# EAGLE board ML8511_Breakout_Panel_v10 (EAGLE 6.5.0), part 1 of 4
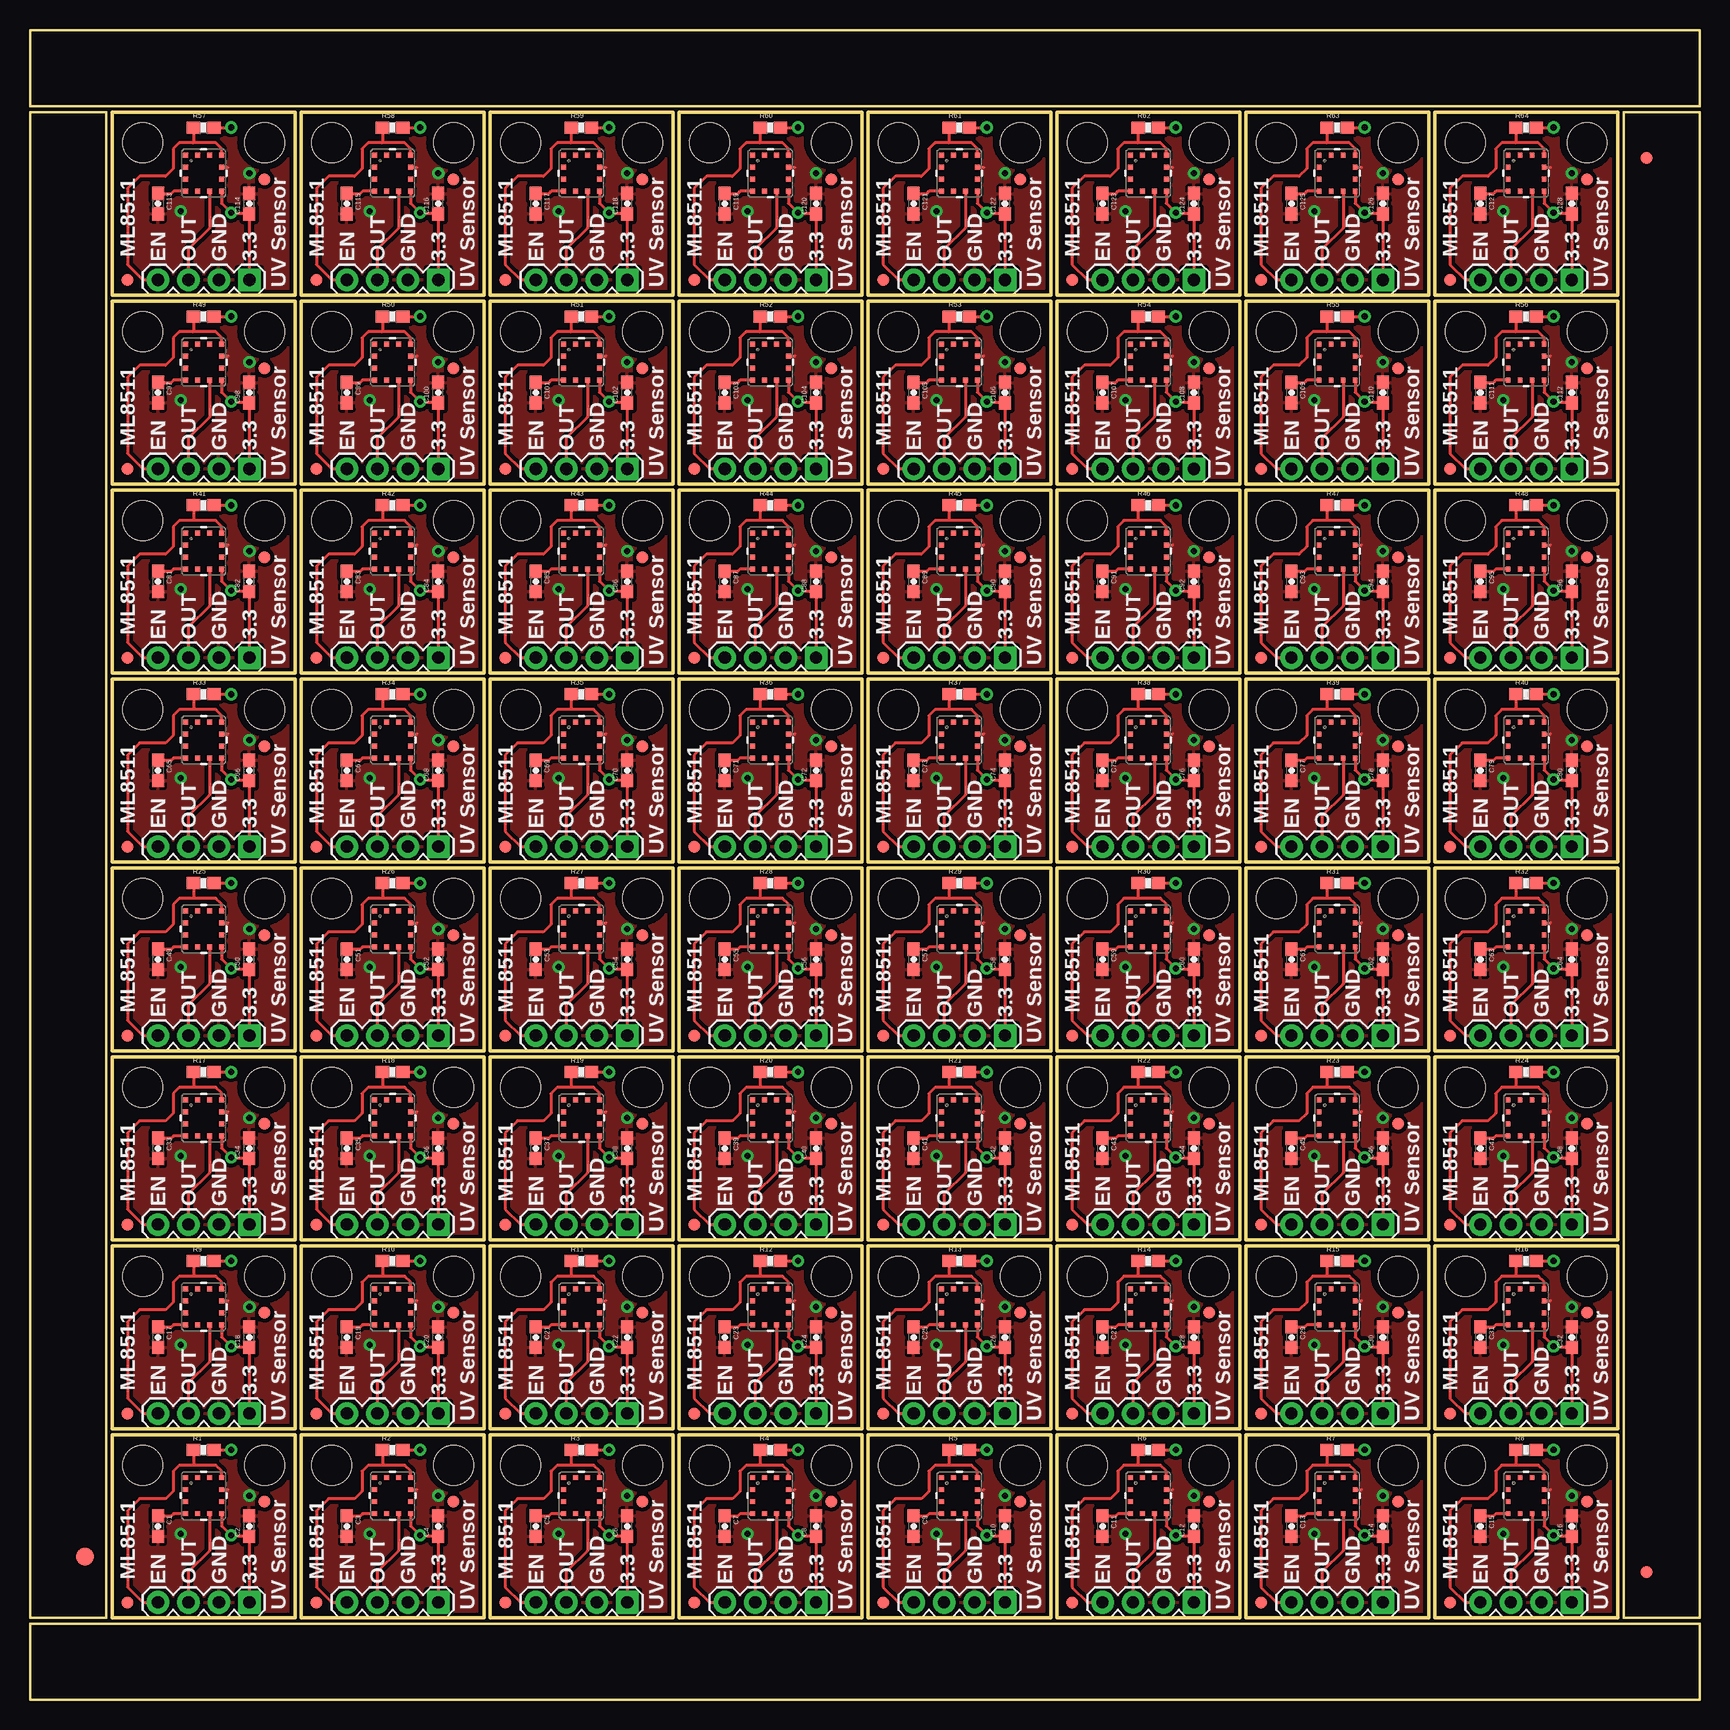
[diagram p0: board, top side]
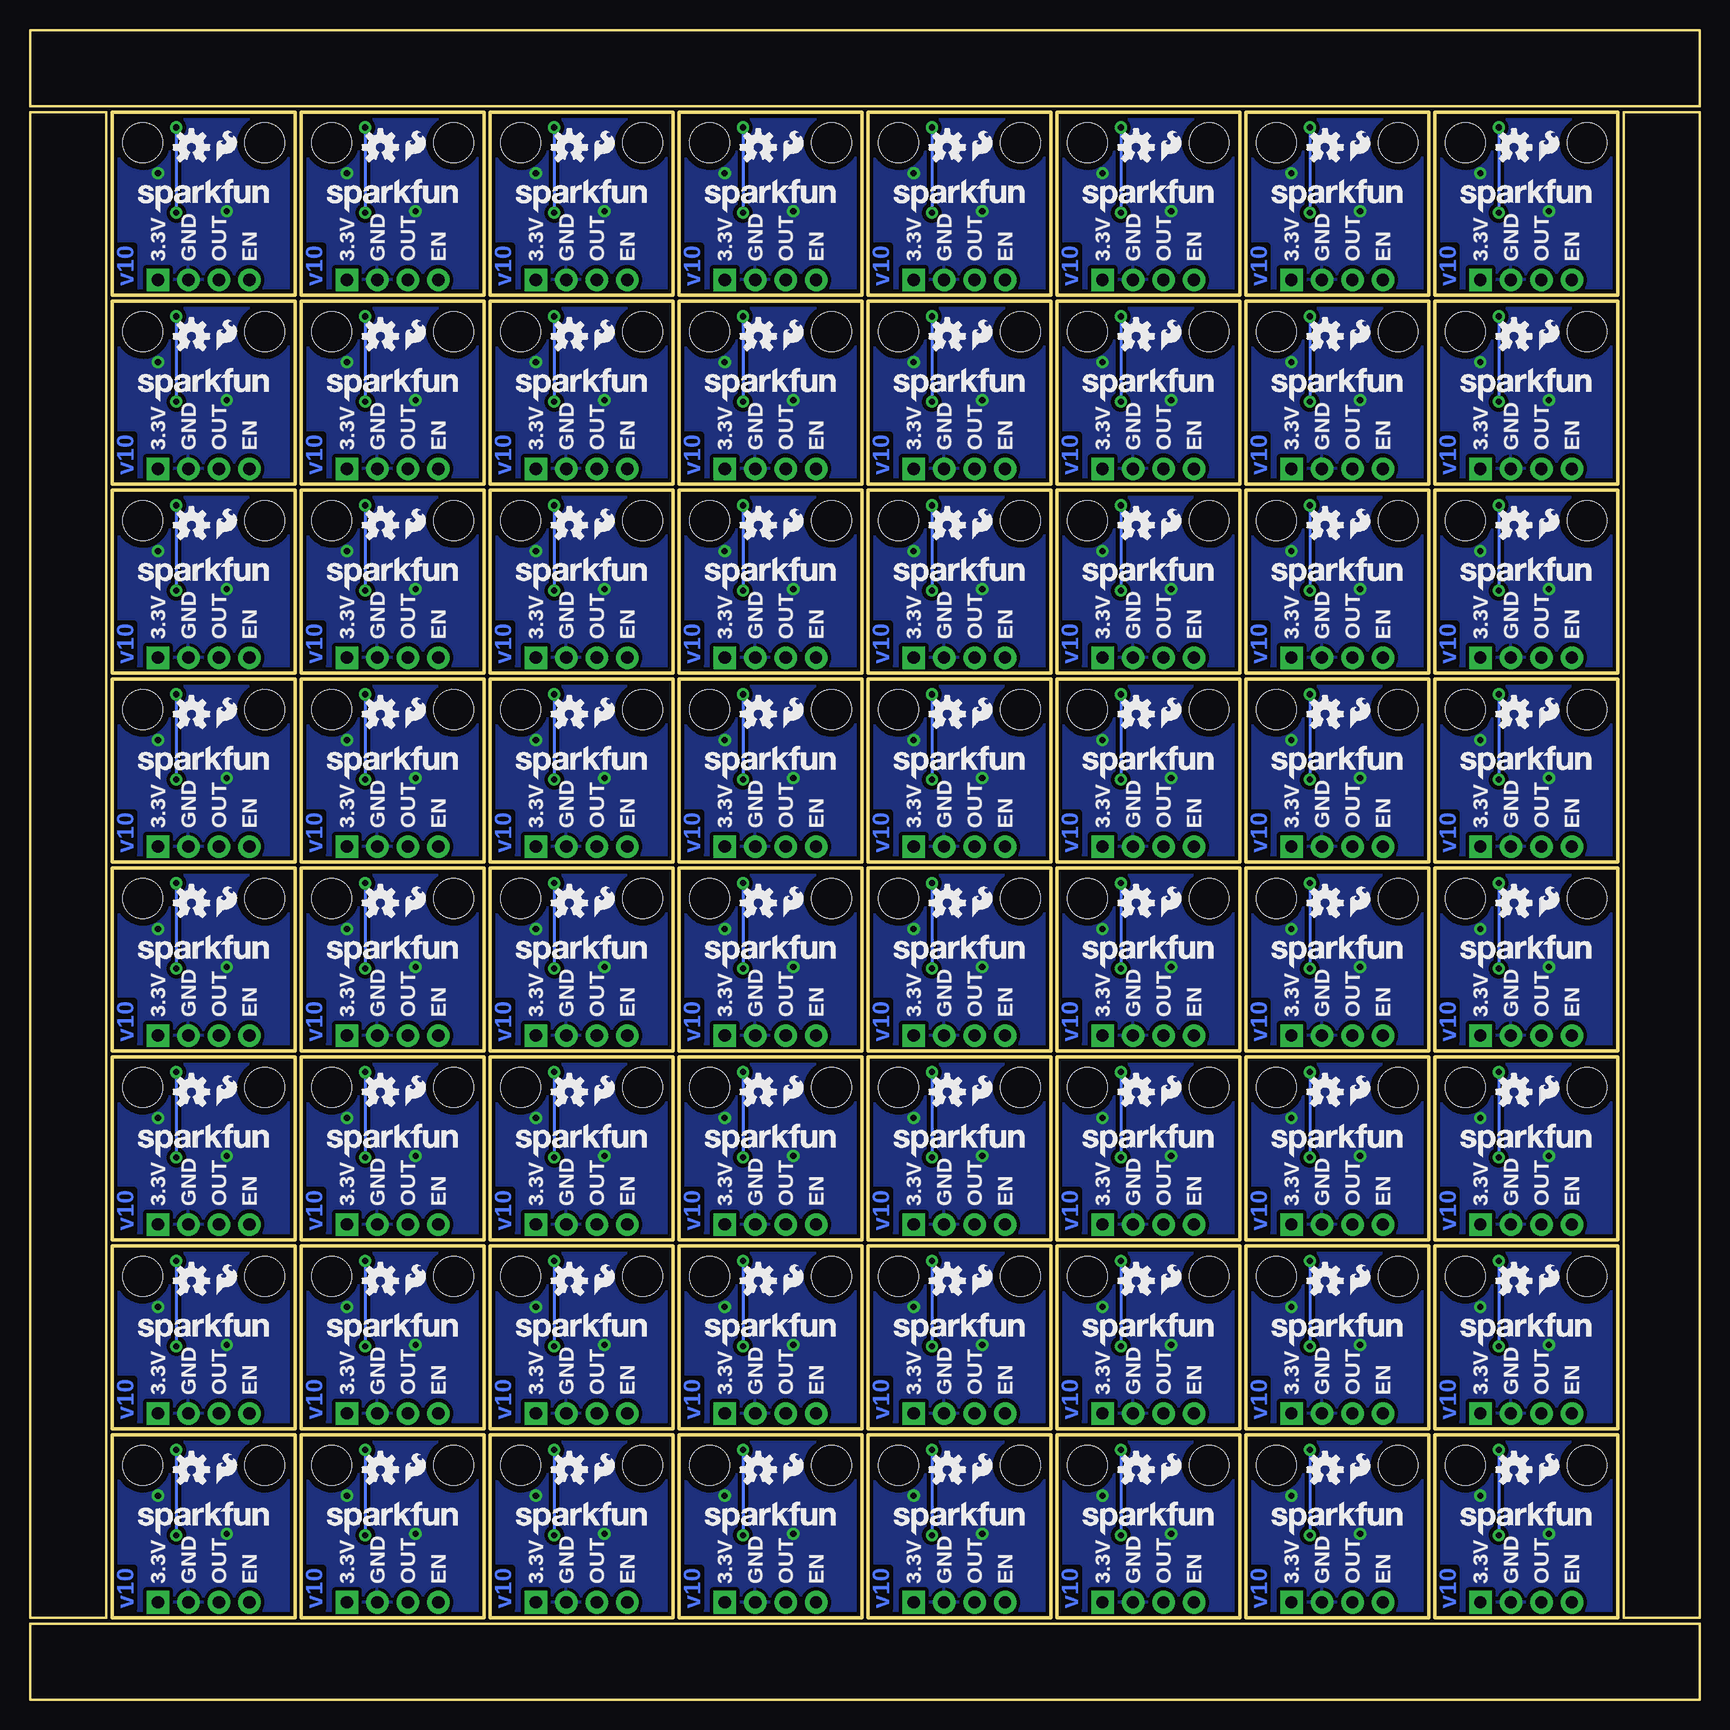
[diagram p1: board, bottom side, seen from below]

Size 139.19 x 139.19 mm. Coordinates in mm from the lower left corner, seen from the top.
Outline: 272 segments
Copper layers (1*16): Top 0.035mm / dielectric 1.5mm / Bottom 0.035mm
Design rules "SparkFun": minimum track width 8mil, minimum drill 20mil, track to track 8mil, track to pad 8mil, pad to pad 8mil, via to via 8mil, smd to smd 8mil, copper to edge 10mil, drill to drill 8mil, minimum pad ring 12mil, minimum via ring 10mil, stop-mask expansion 4mil, vias tented up to drill 25mil, thermal gap 10mil
tRestrict: area 13.5,16.1 to 15.5,18; area 15.9,17.9 to 16,18; area 15.9,17 to 16,17.1; area 29.2,16.1 to 31.2,18; area 31.6,17.9 to 31.8,18; area 31.6,17 to 31.8,17.1; area 45,16.1 to 47,18; area 47.4,17.9 to 47.5,18; area 47.4,17 to 47.5,17.1; area 60.7,16.1 to 62.7,18; area 63.1,17.9 to 63.2,18; area 63.1,17 to 63.2,17.1; 180 more areas

## Footprints (pad centres in the part's own frame; a part is rotated, then mirrored left to right if it is on the bottom)
0603-CAP = smd 1.1 x 1: 1 -0.85,0; 2 0.85,0
FIDUCIAL-1.5X3 = smd 1.5 x 1.5: 1 0,0
FIDUCIAL-1X2 = smd 1 x 1: 1 0,0
1X04 = drill 1.016 pad 1.88 square: 1 0,0 | drill 1.016 pad 1.88: 2 2.54,0; 3 5.08,0; 4 7.62,0
0603-RES = smd 1.1 x 1: 1 -0.85,0; 2 0.85,0
STAND-OFF = hole 3.302: 0,0
ML8511 = smd 0.4 x 0.4: 1 -1.5,-1.5; 2 -1.5,-0.5; 3 -1.5,0.5; 4 -1.5,1.5; 5 -0.5,1.5; 6 0.5,1.5; 7 1.5,1.5; 8 1.5,0.5; 9 1.5,-0.5; 10 1.5,-1.5; 11 0.5,-1.5; 12 -0.5,-1.5

## Placement (x,y rotation side)
C1  1nF  [0603-CAP]  10.67,14.48 270 top
C2  0.1uF  [0603-CAP]  18.29,14.48 90 top
C3  1nF  [0603-CAP]  26.42,14.48 270 top
C4  0.1uF  [0603-CAP]  34.04,14.48 90 top
C5  1nF  [0603-CAP]  42.16,14.48 270 top
C6  0.1uF  [0603-CAP]  49.78,14.48 90 top
C7  1nF  [0603-CAP]  57.91,14.48 270 top
C8  0.1uF  [0603-CAP]  65.53,14.48 90 top
C9  1nF  [0603-CAP]  73.66,14.48 270 top
C10  0.1uF  [0603-CAP]  81.28,14.48 90 top
C11  1nF  [0603-CAP]  89.41,14.48 270 top
C12  0.1uF  [0603-CAP]  97.03,14.48 90 top
C13  1nF  [0603-CAP]  105.16,14.48 270 top
C14  0.1uF  [0603-CAP]  112.78,14.48 90 top
C15  1nF  [0603-CAP]  120.9,14.48 270 top
C16  0.1uF  [0603-CAP]  128.52,14.48 90 top
C17  1nF  [0603-CAP]  10.67,30.23 270 top
C18  0.1uF  [0603-CAP]  18.29,30.23 90 top
C19  1nF  [0603-CAP]  26.42,30.23 270 top
C20  0.1uF  [0603-CAP]  34.04,30.23 90 top
C21  1nF  [0603-CAP]  42.16,30.23 270 top
C22  0.1uF  [0603-CAP]  49.78,30.23 90 top
C23  1nF  [0603-CAP]  57.91,30.23 270 top
C24  0.1uF  [0603-CAP]  65.53,30.23 90 top
C25  1nF  [0603-CAP]  73.66,30.23 270 top
C26  0.1uF  [0603-CAP]  81.28,30.23 90 top
C27  1nF  [0603-CAP]  89.41,30.23 270 top
C28  0.1uF  [0603-CAP]  97.03,30.23 90 top
C29  1nF  [0603-CAP]  105.16,30.23 270 top
C30  0.1uF  [0603-CAP]  112.78,30.23 90 top
C31  1nF  [0603-CAP]  120.9,30.23 270 top
C32  0.1uF  [0603-CAP]  128.52,30.23 90 top
C33  1nF  [0603-CAP]  10.67,45.97 270 top
C34  0.1uF  [0603-CAP]  18.29,45.97 90 top
C35  1nF  [0603-CAP]  26.42,45.97 270 top
C36  0.1uF  [0603-CAP]  34.04,45.97 90 top
C37  1nF  [0603-CAP]  42.16,45.97 270 top
C38  0.1uF  [0603-CAP]  49.78,45.97 90 top
C39  1nF  [0603-CAP]  57.91,45.97 270 top
C40  0.1uF  [0603-CAP]  65.53,45.97 90 top
C41  1nF  [0603-CAP]  73.66,45.97 270 top
C42  0.1uF  [0603-CAP]  81.28,45.97 90 top
C43  1nF  [0603-CAP]  89.41,45.97 270 top
C44  0.1uF  [0603-CAP]  97.03,45.97 90 top
C45  1nF  [0603-CAP]  105.16,45.97 270 top
C46  0.1uF  [0603-CAP]  112.78,45.97 90 top
C47  1nF  [0603-CAP]  120.9,45.97 270 top
C48  0.1uF  [0603-CAP]  128.52,45.97 90 top
C49  1nF  [0603-CAP]  10.67,61.72 270 top
C50  0.1uF  [0603-CAP]  18.29,61.72 90 top
C51  1nF  [0603-CAP]  26.42,61.72 270 top
C52  0.1uF  [0603-CAP]  34.04,61.72 90 top
C53  1nF  [0603-CAP]  42.16,61.72 270 top
C54  0.1uF  [0603-CAP]  49.78,61.72 90 top
C55  1nF  [0603-CAP]  57.91,61.72 270 top
C56  0.1uF  [0603-CAP]  65.53,61.72 90 top
C57  1nF  [0603-CAP]  73.66,61.72 270 top
C58  0.1uF  [0603-CAP]  81.28,61.72 90 top
C59  1nF  [0603-CAP]  89.41,61.72 270 top
C60  0.1uF  [0603-CAP]  97.03,61.72 90 top
C61  1nF  [0603-CAP]  105.16,61.72 270 top
C62  0.1uF  [0603-CAP]  112.78,61.72 90 top
C63  1nF  [0603-CAP]  120.9,61.72 270 top
C64  0.1uF  [0603-CAP]  128.52,61.72 90 top
C65  1nF  [0603-CAP]  10.67,77.47 270 top
C66  0.1uF  [0603-CAP]  18.29,77.47 90 top
C67  1nF  [0603-CAP]  26.42,77.47 270 top
C68  0.1uF  [0603-CAP]  34.04,77.47 90 top
C69  1nF  [0603-CAP]  42.16,77.47 270 top
C70  0.1uF  [0603-CAP]  49.78,77.47 90 top
C71  1nF  [0603-CAP]  57.91,77.47 270 top
C72  0.1uF  [0603-CAP]  65.53,77.47 90 top
C73  1nF  [0603-CAP]  73.66,77.47 270 top
C74  0.1uF  [0603-CAP]  81.28,77.47 90 top
C75  1nF  [0603-CAP]  89.41,77.47 270 top
C76  0.1uF  [0603-CAP]  97.03,77.47 90 top
C77  1nF  [0603-CAP]  105.16,77.47 270 top
C78  0.1uF  [0603-CAP]  112.78,77.47 90 top
C79  1nF  [0603-CAP]  120.9,77.47 270 top
C80  0.1uF  [0603-CAP]  128.52,77.47 90 top
C81  1nF  [0603-CAP]  10.67,93.22 270 top
C82  0.1uF  [0603-CAP]  18.29,93.22 90 top
C83  1nF  [0603-CAP]  26.42,93.22 270 top
C84  0.1uF  [0603-CAP]  34.04,93.22 90 top
C85  1nF  [0603-CAP]  42.16,93.22 270 top
C86  0.1uF  [0603-CAP]  49.78,93.22 90 top
C87  1nF  [0603-CAP]  57.91,93.22 270 top
C88  0.1uF  [0603-CAP]  65.53,93.22 90 top
C89  1nF  [0603-CAP]  73.66,93.22 270 top
C90  0.1uF  [0603-CAP]  81.28,93.22 90 top
C91  1nF  [0603-CAP]  89.41,93.22 270 top
C92  0.1uF  [0603-CAP]  97.03,93.22 90 top
C93  1nF  [0603-CAP]  105.16,93.22 270 top
C94  0.1uF  [0603-CAP]  112.78,93.22 90 top
C95  1nF  [0603-CAP]  120.9,93.22 270 top
C96  0.1uF  [0603-CAP]  128.52,93.22 90 top
C97  1nF  [0603-CAP]  10.67,108.97 270 top
C98  0.1uF  [0603-CAP]  18.29,108.97 90 top
C99  1nF  [0603-CAP]  26.42,108.97 270 top
C100  0.1uF  [0603-CAP]  34.04,108.97 90 top
C101  1nF  [0603-CAP]  42.16,108.97 270 top
C102  0.1uF  [0603-CAP]  49.78,108.97 90 top
C103  1nF  [0603-CAP]  57.91,108.97 270 top
C104  0.1uF  [0603-CAP]  65.53,108.97 90 top
C105  1nF  [0603-CAP]  73.66,108.97 270 top
C106  0.1uF  [0603-CAP]  81.28,108.97 90 top
C107  1nF  [0603-CAP]  89.41,108.97 270 top
C108  0.1uF  [0603-CAP]  97.03,108.97 90 top
C109  1nF  [0603-CAP]  105.16,108.97 270 top
C110  0.1uF  [0603-CAP]  112.78,108.97 90 top
C111  1nF  [0603-CAP]  120.9,108.97 270 top
C112  0.1uF  [0603-CAP]  128.52,108.97 90 top
C113  1nF  [0603-CAP]  10.67,124.71 270 top
C114  0.1uF  [0603-CAP]  18.29,124.71 90 top
C115  1nF  [0603-CAP]  26.42,124.71 270 top
C116  0.1uF  [0603-CAP]  34.04,124.71 90 top
C117  1nF  [0603-CAP]  42.16,124.71 270 top
C118  0.1uF  [0603-CAP]  49.78,124.71 90 top
C119  1nF  [0603-CAP]  57.91,124.71 270 top
C120  0.1uF  [0603-CAP]  65.53,124.71 90 top
C121  1nF  [0603-CAP]  73.66,124.71 270 top
C122  0.1uF  [0603-CAP]  81.28,124.71 90 top
C123  1nF  [0603-CAP]  89.41,124.71 270 top
C124  0.1uF  [0603-CAP]  97.03,124.71 90 top
C125  1nF  [0603-CAP]  105.16,124.71 270 top
C126  0.1uF  [0603-CAP]  112.78,124.71 90 top
C127  1nF  [0603-CAP]  120.9,124.71 270 top
C128  0.1uF  [0603-CAP]  128.52,124.71 90 top
E$1  [FIDUCIAL-1.5X3]  4.57,11.94 0 top
E$4  [FIDUCIAL-1X2]  134.75,10.67 0 top
E$5  [FIDUCIAL-1X2]  134.75,128.52 180 top
FID1  FIDUCIAL1X2  [FIDUCIAL-1X2]  19.56,16.51 0 top
FID2  FIDUCIAL1X2  [FIDUCIAL-1X2]  8.13,8.13 0 top
FID3  FIDUCIAL1X2  [FIDUCIAL-1X2]  35.31,16.51 0 top
FID4  FIDUCIAL1X2  [FIDUCIAL-1X2]  23.88,8.13 0 top
FID5  FIDUCIAL1X2  [FIDUCIAL-1X2]  51.05,16.51 0 top
FID6  FIDUCIAL1X2  [FIDUCIAL-1X2]  39.62,8.13 0 top
FID7  FIDUCIAL1X2  [FIDUCIAL-1X2]  66.8,16.51 0 top
FID8  FIDUCIAL1X2  [FIDUCIAL-1X2]  55.37,8.13 0 top
FID9  FIDUCIAL1X2  [FIDUCIAL-1X2]  82.55,16.51 0 top
FID10  FIDUCIAL1X2  [FIDUCIAL-1X2]  71.12,8.13 0 top
FID11  FIDUCIAL1X2  [FIDUCIAL-1X2]  98.3,16.51 0 top
FID12  FIDUCIAL1X2  [FIDUCIAL-1X2]  86.87,8.13 0 top
FID13  FIDUCIAL1X2  [FIDUCIAL-1X2]  114.05,16.51 0 top
FID14  FIDUCIAL1X2  [FIDUCIAL-1X2]  102.62,8.13 0 top
FID15  FIDUCIAL1X2  [FIDUCIAL-1X2]  129.79,16.51 0 top
FID16  FIDUCIAL1X2  [FIDUCIAL-1X2]  118.36,8.13 0 top
FID17  FIDUCIAL1X2  [FIDUCIAL-1X2]  19.56,32.26 0 top
FID18  FIDUCIAL1X2  [FIDUCIAL-1X2]  8.13,23.88 0 top
FID19  FIDUCIAL1X2  [FIDUCIAL-1X2]  35.31,32.26 0 top
FID20  FIDUCIAL1X2  [FIDUCIAL-1X2]  23.88,23.88 0 top
FID21  FIDUCIAL1X2  [FIDUCIAL-1X2]  51.05,32.26 0 top
FID22  FIDUCIAL1X2  [FIDUCIAL-1X2]  39.62,23.88 0 top
FID23  FIDUCIAL1X2  [FIDUCIAL-1X2]  66.8,32.26 0 top
FID24  FIDUCIAL1X2  [FIDUCIAL-1X2]  55.37,23.88 0 top
FID25  FIDUCIAL1X2  [FIDUCIAL-1X2]  82.55,32.26 0 top
FID26  FIDUCIAL1X2  [FIDUCIAL-1X2]  71.12,23.88 0 top
FID27  FIDUCIAL1X2  [FIDUCIAL-1X2]  98.3,32.26 0 top
FID28  FIDUCIAL1X2  [FIDUCIAL-1X2]  86.87,23.88 0 top
FID29  FIDUCIAL1X2  [FIDUCIAL-1X2]  114.05,32.26 0 top
FID30  FIDUCIAL1X2  [FIDUCIAL-1X2]  102.62,23.88 0 top
FID31  FIDUCIAL1X2  [FIDUCIAL-1X2]  129.79,32.26 0 top
FID32  FIDUCIAL1X2  [FIDUCIAL-1X2]  118.36,23.88 0 top
FID33  FIDUCIAL1X2  [FIDUCIAL-1X2]  19.56,48.01 0 top
FID34  FIDUCIAL1X2  [FIDUCIAL-1X2]  8.13,39.62 0 top
FID35  FIDUCIAL1X2  [FIDUCIAL-1X2]  35.31,48.01 0 top
FID36  FIDUCIAL1X2  [FIDUCIAL-1X2]  23.88,39.62 0 top
FID37  FIDUCIAL1X2  [FIDUCIAL-1X2]  51.05,48.01 0 top
FID38  FIDUCIAL1X2  [FIDUCIAL-1X2]  39.62,39.62 0 top
FID39  FIDUCIAL1X2  [FIDUCIAL-1X2]  66.8,48.01 0 top
FID40  FIDUCIAL1X2  [FIDUCIAL-1X2]  55.37,39.62 0 top
FID41  FIDUCIAL1X2  [FIDUCIAL-1X2]  82.55,48.01 0 top
FID42  FIDUCIAL1X2  [FIDUCIAL-1X2]  71.12,39.62 0 top
FID43  FIDUCIAL1X2  [FIDUCIAL-1X2]  98.3,48.01 0 top
FID44  FIDUCIAL1X2  [FIDUCIAL-1X2]  86.87,39.62 0 top
FID45  FIDUCIAL1X2  [FIDUCIAL-1X2]  114.05,48.01 0 top
FID46  FIDUCIAL1X2  [FIDUCIAL-1X2]  102.62,39.62 0 top
FID47  FIDUCIAL1X2  [FIDUCIAL-1X2]  129.79,48.01 0 top
FID48  FIDUCIAL1X2  [FIDUCIAL-1X2]  118.36,39.62 0 top
FID49  FIDUCIAL1X2  [FIDUCIAL-1X2]  19.56,63.75 0 top
FID50  FIDUCIAL1X2  [FIDUCIAL-1X2]  8.13,55.37 0 top
FID51  FIDUCIAL1X2  [FIDUCIAL-1X2]  35.31,63.75 0 top
FID52  FIDUCIAL1X2  [FIDUCIAL-1X2]  23.88,55.37 0 top
FID53  FIDUCIAL1X2  [FIDUCIAL-1X2]  51.05,63.75 0 top
FID54  FIDUCIAL1X2  [FIDUCIAL-1X2]  39.62,55.37 0 top
FID55  FIDUCIAL1X2  [FIDUCIAL-1X2]  66.8,63.75 0 top
FID56  FIDUCIAL1X2  [FIDUCIAL-1X2]  55.37,55.37 0 top
FID57  FIDUCIAL1X2  [FIDUCIAL-1X2]  82.55,63.75 0 top
FID58  FIDUCIAL1X2  [FIDUCIAL-1X2]  71.12,55.37 0 top
FID59  FIDUCIAL1X2  [FIDUCIAL-1X2]  98.3,63.75 0 top
FID60  FIDUCIAL1X2  [FIDUCIAL-1X2]  86.87,55.37 0 top
FID61  FIDUCIAL1X2  [FIDUCIAL-1X2]  114.05,63.75 0 top
FID62  FIDUCIAL1X2  [FIDUCIAL-1X2]  102.62,55.37 0 top
FID63  FIDUCIAL1X2  [FIDUCIAL-1X2]  129.79,63.75 0 top
FID64  FIDUCIAL1X2  [FIDUCIAL-1X2]  118.36,55.37 0 top
FID65  FIDUCIAL1X2  [FIDUCIAL-1X2]  19.56,79.5 0 top
FID66  FIDUCIAL1X2  [FIDUCIAL-1X2]  8.13,71.12 0 top
FID67  FIDUCIAL1X2  [FIDUCIAL-1X2]  35.31,79.5 0 top
FID68  FIDUCIAL1X2  [FIDUCIAL-1X2]  23.88,71.12 0 top
FID69  FIDUCIAL1X2  [FIDUCIAL-1X2]  51.05,79.5 0 top
FID70  FIDUCIAL1X2  [FIDUCIAL-1X2]  39.62,71.12 0 top
FID71  FIDUCIAL1X2  [FIDUCIAL-1X2]  66.8,79.5 0 top
FID72  FIDUCIAL1X2  [FIDUCIAL-1X2]  55.37,71.12 0 top
FID73  FIDUCIAL1X2  [FIDUCIAL-1X2]  82.55,79.5 0 top
FID74  FIDUCIAL1X2  [FIDUCIAL-1X2]  71.12,71.12 0 top
FID75  FIDUCIAL1X2  [FIDUCIAL-1X2]  98.3,79.5 0 top
FID76  FIDUCIAL1X2  [FIDUCIAL-1X2]  86.87,71.12 0 top
FID77  FIDUCIAL1X2  [FIDUCIAL-1X2]  114.05,79.5 0 top
FID78  FIDUCIAL1X2  [FIDUCIAL-1X2]  102.62,71.12 0 top
FID79  FIDUCIAL1X2  [FIDUCIAL-1X2]  129.79,79.5 0 top
FID80  FIDUCIAL1X2  [FIDUCIAL-1X2]  118.36,71.12 0 top
FID81  FIDUCIAL1X2  [FIDUCIAL-1X2]  19.56,95.25 0 top
FID82  FIDUCIAL1X2  [FIDUCIAL-1X2]  8.13,86.87 0 top
FID83  FIDUCIAL1X2  [FIDUCIAL-1X2]  35.31,95.25 0 top
FID84  FIDUCIAL1X2  [FIDUCIAL-1X2]  23.88,86.87 0 top
FID85  FIDUCIAL1X2  [FIDUCIAL-1X2]  51.05,95.25 0 top
FID86  FIDUCIAL1X2  [FIDUCIAL-1X2]  39.62,86.87 0 top
FID87  FIDUCIAL1X2  [FIDUCIAL-1X2]  66.8,95.25 0 top
FID88  FIDUCIAL1X2  [FIDUCIAL-1X2]  55.37,86.87 0 top
FID89  FIDUCIAL1X2  [FIDUCIAL-1X2]  82.55,95.25 0 top
FID90  FIDUCIAL1X2  [FIDUCIAL-1X2]  71.12,86.87 0 top
FID91  FIDUCIAL1X2  [FIDUCIAL-1X2]  98.3,95.25 0 top
FID92  FIDUCIAL1X2  [FIDUCIAL-1X2]  86.87,86.87 0 top
FID93  FIDUCIAL1X2  [FIDUCIAL-1X2]  114.05,95.25 0 top
FID94  FIDUCIAL1X2  [FIDUCIAL-1X2]  102.62,86.87 0 top
FID95  FIDUCIAL1X2  [FIDUCIAL-1X2]  129.79,95.25 0 top
FID96  FIDUCIAL1X2  [FIDUCIAL-1X2]  118.36,86.87 0 top
FID97  FIDUCIAL1X2  [FIDUCIAL-1X2]  19.56,111 0 top
FID98  FIDUCIAL1X2  [FIDUCIAL-1X2]  8.13,102.62 0 top
FID99  FIDUCIAL1X2  [FIDUCIAL-1X2]  35.31,111 0 top
FID100  FIDUCIAL1X2  [FIDUCIAL-1X2]  23.88,102.62 0 top
FID101  FIDUCIAL1X2  [FIDUCIAL-1X2]  51.05,111 0 top
FID102  FIDUCIAL1X2  [FIDUCIAL-1X2]  39.62,102.62 0 top
FID103  FIDUCIAL1X2  [FIDUCIAL-1X2]  66.8,111 0 top
FID104  FIDUCIAL1X2  [FIDUCIAL-1X2]  55.37,102.62 0 top
FID105  FIDUCIAL1X2  [FIDUCIAL-1X2]  82.55,111 0 top
FID106  FIDUCIAL1X2  [FIDUCIAL-1X2]  71.12,102.62 0 top
FID107  FIDUCIAL1X2  [FIDUCIAL-1X2]  98.3,111 0 top
FID108  FIDUCIAL1X2  [FIDUCIAL-1X2]  86.87,102.62 0 top
FID109  FIDUCIAL1X2  [FIDUCIAL-1X2]  114.05,111 0 top
FID110  FIDUCIAL1X2  [FIDUCIAL-1X2]  102.62,102.62 0 top
FID111  FIDUCIAL1X2  [FIDUCIAL-1X2]  129.79,111 0 top
FID112  FIDUCIAL1X2  [FIDUCIAL-1X2]  118.36,102.62 0 top
FID113  FIDUCIAL1X2  [FIDUCIAL-1X2]  19.56,126.75 0 top
FID114  FIDUCIAL1X2  [FIDUCIAL-1X2]  8.13,118.36 0 top
FID115  FIDUCIAL1X2  [FIDUCIAL-1X2]  35.31,126.75 0 top
FID116  FIDUCIAL1X2  [FIDUCIAL-1X2]  23.88,118.36 0 top
FID117  FIDUCIAL1X2  [FIDUCIAL-1X2]  51.05,126.75 0 top
FID118  FIDUCIAL1X2  [FIDUCIAL-1X2]  39.62,118.36 0 top
FID119  FIDUCIAL1X2  [FIDUCIAL-1X2]  66.8,126.75 0 top
FID120  FIDUCIAL1X2  [FIDUCIAL-1X2]  55.37,118.36 0 top
FID121  FIDUCIAL1X2  [FIDUCIAL-1X2]  82.55,126.75 0 top
FID122  FIDUCIAL1X2  [FIDUCIAL-1X2]  71.12,118.36 0 top
FID123  FIDUCIAL1X2  [FIDUCIAL-1X2]  98.3,126.75 0 top
FID124  FIDUCIAL1X2  [FIDUCIAL-1X2]  86.87,118.36 0 top
FID125  FIDUCIAL1X2  [FIDUCIAL-1X2]  114.05,126.75 0 top
FID126  FIDUCIAL1X2  [FIDUCIAL-1X2]  102.62,118.36 0 top
FID127  FIDUCIAL1X2  [FIDUCIAL-1X2]  129.79,126.75 0 top
FID128  FIDUCIAL1X2  [FIDUCIAL-1X2]  118.36,118.36 0 top
JP1  [1X04]  34.04,8.13 180 top
JP2  [1X04]  18.29,8.13 180 top
JP3  [1X04]  49.78,8.13 180 top
JP4  [1X04]  65.53,8.13 180 top
JP5  [1X04]  81.28,8.13 180 top
JP6  [1X04]  97.03,8.13 180 top
JP7  [1X04]  112.78,8.13 180 top
JP8  [1X04]  128.52,8.13 180 top
JP9  [1X04]  18.29,23.88 180 top
JP10  [1X04]  34.04,23.88 180 top
JP11  [1X04]  49.78,23.88 180 top
JP12  [1X04]  65.53,23.88 180 top
JP13  [1X04]  81.28,23.88 180 top
JP14  [1X04]  97.03,23.88 180 top
JP15  [1X04]  112.78,23.88 180 top
JP16  [1X04]  128.52,23.88 180 top
JP17  [1X04]  18.29,39.62 180 top
JP18  [1X04]  34.04,39.62 180 top
JP19  [1X04]  49.78,39.62 180 top
JP20  [1X04]  65.53,39.62 180 top
JP21  [1X04]  81.28,39.62 180 top
JP22  [1X04]  97.03,39.62 180 top
JP23  [1X04]  112.78,39.62 180 top
JP24  [1X04]  128.52,39.62 180 top
JP25  [1X04]  18.29,55.37 180 top
JP26  [1X04]  34.04,55.37 180 top
JP27  [1X04]  49.78,55.37 180 top
JP28  [1X04]  65.53,55.37 180 top
JP29  [1X04]  81.28,55.37 180 top
JP30  [1X04]  97.03,55.37 180 top
JP31  [1X04]  112.78,55.37 180 top
JP32  [1X04]  128.52,55.37 180 top
JP33  [1X04]  18.29,71.12 180 top
JP34  [1X04]  34.04,71.12 180 top
JP35  [1X04]  49.78,71.12 180 top
JP36  [1X04]  65.53,71.12 180 top
JP37  [1X04]  81.28,71.12 180 top
JP38  [1X04]  97.03,71.12 180 top
JP39  [1X04]  112.78,71.12 180 top
JP40  [1X04]  128.52,71.12 180 top
JP41  [1X04]  18.29,86.87 180 top
JP42  [1X04]  34.04,86.87 180 top
JP43  [1X04]  49.78,86.87 180 top
JP44  [1X04]  65.53,86.87 180 top
JP45  [1X04]  81.28,86.87 180 top
JP46  [1X04]  97.03,86.87 180 top
JP47  [1X04]  112.78,86.87 180 top
JP48  [1X04]  128.52,86.87 180 top
JP49  [1X04]  18.29,102.62 180 top
JP50  [1X04]  34.04,102.62 180 top
JP51  [1X04]  49.78,102.62 180 top
JP52  [1X04]  65.53,102.62 180 top
JP53  [1X04]  81.28,102.62 180 top
JP54  [1X04]  97.03,102.62 180 top
JP55  [1X04]  112.78,102.62 180 top
JP56  [1X04]  128.52,102.62 180 top
JP57  [1X04]  18.29,118.36 180 top
JP58  [1X04]  34.04,118.36 180 top
JP59  [1X04]  49.78,118.36 180 top
JP60  [1X04]  65.53,118.36 180 top
JP61  [1X04]  81.28,118.36 180 top
JP62  [1X04]  97.03,118.36 180 top
JP63  [1X04]  112.78,118.36 180 top
JP64  [1X04]  128.52,118.36 180 top
LOGO1  OSHW-LOGOS  [OSHW-LOGO-S]  31.24,19.18 0 bottom
LOGO2  OSHW-LOGOS  [OSHW-LOGO-S]  15.49,19.18 0 bottom
LOGO3  SFE_LOGO_FLAME.1_INCH  [SFE_LOGO_FLAME_.1]  13.72,17.65 0 bottom
LOGO4  SFE_LOGO_NAME.1_INCH  [SFE_LOGO_NAME_.1]  20.45,13.21 0 bottom
LOGO5  SFE_LOGO_FLAME.1_INCH  [SFE_LOGO_FLAME_.1]  29.46,17.65 0 bottom
LOGO6  SFE_LOGO_NAME.1_INCH  [SFE_LOGO_NAME_.1]  36.2,13.21 0 bottom
LOGO7  OSHW-LOGOS  [OSHW-LOGO-S]  46.99,19.18 0 bottom
LOGO8  SFE_LOGO_FLAME.1_INCH  [SFE_LOGO_FLAME_.1]  45.21,17.65 0 bottom
LOGO9  SFE_LOGO_NAME.1_INCH  [SFE_LOGO_NAME_.1]  51.94,13.21 0 bottom
LOGO10  OSHW-LOGOS  [OSHW-LOGO-S]  62.74,19.18 0 bottom
LOGO11  SFE_LOGO_FLAME.1_INCH  [SFE_LOGO_FLAME_.1]  60.96,17.65 0 bottom
LOGO12  SFE_LOGO_NAME.1_INCH  [SFE_LOGO_NAME_.1]  67.69,13.21 0 bottom
LOGO13  OSHW-LOGOS  [OSHW-LOGO-S]  78.49,19.18 0 bottom
LOGO14  SFE_LOGO_FLAME.1_INCH  [SFE_LOGO_FLAME_.1]  76.71,17.65 0 bottom
LOGO15  SFE_LOGO_NAME.1_INCH  [SFE_LOGO_NAME_.1]  83.44,13.21 0 bottom
LOGO16  OSHW-LOGOS  [OSHW-LOGO-S]  94.23,19.18 0 bottom
LOGO17  SFE_LOGO_FLAME.1_INCH  [SFE_LOGO_FLAME_.1]  92.46,17.65 0 bottom
LOGO18  SFE_LOGO_NAME.1_INCH  [SFE_LOGO_NAME_.1]  99.19,13.21 0 bottom
LOGO19  OSHW-LOGOS  [OSHW-LOGO-S]  109.98,19.18 0 bottom
LOGO20  SFE_LOGO_FLAME.1_INCH  [SFE_LOGO_FLAME_.1]  108.2,17.65 0 bottom
LOGO21  SFE_LOGO_NAME.1_INCH  [SFE_LOGO_NAME_.1]  114.94,13.21 0 bottom
LOGO22  OSHW-LOGOS  [OSHW-LOGO-S]  125.73,19.18 0 bottom
LOGO23  SFE_LOGO_FLAME.1_INCH  [SFE_LOGO_FLAME_.1]  123.95,17.65 0 bottom
LOGO24  SFE_LOGO_NAME.1_INCH  [SFE_LOGO_NAME_.1]  130.68,13.21 0 bottom
LOGO25  OSHW-LOGOS  [OSHW-LOGO-S]  15.49,34.92 0 bottom
LOGO26  SFE_LOGO_FLAME.1_INCH  [SFE_LOGO_FLAME_.1]  13.72,33.4 0 bottom
LOGO27  SFE_LOGO_NAME.1_INCH  [SFE_LOGO_NAME_.1]  20.45,28.96 0 bottom
LOGO28  OSHW-LOGOS  [OSHW-LOGO-S]  31.24,34.92 0 bottom
LOGO29  SFE_LOGO_FLAME.1_INCH  [SFE_LOGO_FLAME_.1]  29.46,33.4 0 bottom
LOGO30  SFE_LOGO_NAME.1_INCH  [SFE_LOGO_NAME_.1]  36.2,28.96 0 bottom
LOGO31  OSHW-LOGOS  [OSHW-LOGO-S]  46.99,34.92 0 bottom
LOGO32  SFE_LOGO_FLAME.1_INCH  [SFE_LOGO_FLAME_.1]  45.21,33.4 0 bottom
LOGO33  SFE_LOGO_NAME.1_INCH  [SFE_LOGO_NAME_.1]  51.94,28.96 0 bottom
LOGO34  OSHW-LOGOS  [OSHW-LOGO-S]  62.74,34.92 0 bottom
LOGO35  SFE_LOGO_FLAME.1_INCH  [SFE_LOGO_FLAME_.1]  60.96,33.4 0 bottom
LOGO36  SFE_LOGO_NAME.1_INCH  [SFE_LOGO_NAME_.1]  67.69,28.96 0 bottom
LOGO37  OSHW-LOGOS  [OSHW-LOGO-S]  78.49,34.92 0 bottom
LOGO38  SFE_LOGO_FLAME.1_INCH  [SFE_LOGO_FLAME_.1]  76.71,33.4 0 bottom
LOGO39  SFE_LOGO_NAME.1_INCH  [SFE_LOGO_NAME_.1]  83.44,28.96 0 bottom
LOGO40  OSHW-LOGOS  [OSHW-LOGO-S]  94.23,34.92 0 bottom
LOGO41  SFE_LOGO_FLAME.1_INCH  [SFE_LOGO_FLAME_.1]  92.46,33.4 0 bottom
LOGO42  SFE_LOGO_NAME.1_INCH  [SFE_LOGO_NAME_.1]  99.19,28.96 0 bottom
LOGO43  OSHW-LOGOS  [OSHW-LOGO-S]  109.98,34.92 0 bottom
LOGO44  SFE_LOGO_FLAME.1_INCH  [SFE_LOGO_FLAME_.1]  108.2,33.4 0 bottom
LOGO45  SFE_LOGO_NAME.1_INCH  [SFE_LOGO_NAME_.1]  114.94,28.96 0 bottom
LOGO46  OSHW-LOGOS  [OSHW-LOGO-S]  125.73,34.92 0 bottom
LOGO47  SFE_LOGO_FLAME.1_INCH  [SFE_LOGO_FLAME_.1]  123.95,33.4 0 bottom
LOGO48  SFE_LOGO_NAME.1_INCH  [SFE_LOGO_NAME_.1]  130.68,28.96 0 bottom
LOGO49  OSHW-LOGOS  [OSHW-LOGO-S]  15.49,50.67 0 bottom
LOGO50  SFE_LOGO_FLAME.1_INCH  [SFE_LOGO_FLAME_.1]  13.72,49.15 0 bottom
LOGO51  SFE_LOGO_NAME.1_INCH  [SFE_LOGO_NAME_.1]  20.45,44.7 0 bottom
LOGO52  OSHW-LOGOS  [OSHW-LOGO-S]  31.24,50.67 0 bottom
LOGO53  SFE_LOGO_FLAME.1_INCH  [SFE_LOGO_FLAME_.1]  29.46,49.15 0 bottom
LOGO54  SFE_LOGO_NAME.1_INCH  [SFE_LOGO_NAME_.1]  36.2,44.7 0 bottom
LOGO55  OSHW-LOGOS  [OSHW-LOGO-S]  46.99,50.67 0 bottom
LOGO56  SFE_LOGO_FLAME.1_INCH  [SFE_LOGO_FLAME_.1]  45.21,49.15 0 bottom
LOGO57  SFE_LOGO_NAME.1_INCH  [SFE_LOGO_NAME_.1]  51.94,44.7 0 bottom
LOGO58  OSHW-LOGOS  [OSHW-LOGO-S]  62.74,50.67 0 bottom
LOGO59  SFE_LOGO_FLAME.1_INCH  [SFE_LOGO_FLAME_.1]  60.96,49.15 0 bottom
LOGO60  SFE_LOGO_NAME.1_INCH  [SFE_LOGO_NAME_.1]  67.69,44.7 0 bottom
LOGO61  OSHW-LOGOS  [OSHW-LOGO-S]  78.49,50.67 0 bottom
LOGO62  SFE_LOGO_FLAME.1_INCH  [SFE_LOGO_FLAME_.1]  76.71,49.15 0 bottom
LOGO63  SFE_LOGO_NAME.1_INCH  [SFE_LOGO_NAME_.1]  83.44,44.7 0 bottom
LOGO64  OSHW-LOGOS  [OSHW-LOGO-S]  94.23,50.67 0 bottom
LOGO65  SFE_LOGO_FLAME.1_INCH  [SFE_LOGO_FLAME_.1]  92.46,49.15 0 bottom
LOGO66  SFE_LOGO_NAME.1_INCH  [SFE_LOGO_NAME_.1]  99.19,44.7 0 bottom
LOGO67  OSHW-LOGOS  [OSHW-LOGO-S]  109.98,50.67 0 bottom
LOGO68  SFE_LOGO_FLAME.1_INCH  [SFE_LOGO_FLAME_.1]  108.2,49.15 0 bottom
LOGO69  SFE_LOGO_NAME.1_INCH  [SFE_LOGO_NAME_.1]  114.94,44.7 0 bottom
LOGO70  OSHW-LOGOS  [OSHW-LOGO-S]  125.73,50.67 0 bottom
LOGO71  SFE_LOGO_FLAME.1_INCH  [SFE_LOGO_FLAME_.1]  123.95,49.15 0 bottom
LOGO72  SFE_LOGO_NAME.1_INCH  [SFE_LOGO_NAME_.1]  130.68,44.7 0 bottom
LOGO73  OSHW-LOGOS  [OSHW-LOGO-S]  15.49,66.42 0 bottom
LOGO74  SFE_LOGO_FLAME.1_INCH  [SFE_LOGO_FLAME_.1]  13.72,64.9 0 bottom
LOGO75  SFE_LOGO_NAME.1_INCH  [SFE_LOGO_NAME_.1]  20.45,60.45 0 bottom
LOGO76  OSHW-LOGOS  [OSHW-LOGO-S]  31.24,66.42 0 bottom
LOGO77  SFE_LOGO_FLAME.1_INCH  [SFE_LOGO_FLAME_.1]  29.46,64.9 0 bottom
LOGO78  SFE_LOGO_NAME.1_INCH  [SFE_LOGO_NAME_.1]  36.2,60.45 0 bottom
LOGO79  OSHW-LOGOS  [OSHW-LOGO-S]  46.99,66.42 0 bottom
LOGO80  SFE_LOGO_FLAME.1_INCH  [SFE_LOGO_FLAME_.1]  45.21,64.9 0 bottom
LOGO81  SFE_LOGO_NAME.1_INCH  [SFE_LOGO_NAME_.1]  51.94,60.45 0 bottom
LOGO82  OSHW-LOGOS  [OSHW-LOGO-S]  62.74,66.42 0 bottom
LOGO83  SFE_LOGO_FLAME.1_INCH  [SFE_LOGO_FLAME_.1]  60.96,64.9 0 bottom
LOGO84  SFE_LOGO_NAME.1_INCH  [SFE_LOGO_NAME_.1]  67.69,60.45 0 bottom
LOGO85  OSHW-LOGOS  [OSHW-LOGO-S]  78.49,66.42 0 bottom
LOGO86  SFE_LOGO_FLAME.1_INCH  [SFE_LOGO_FLAME_.1]  76.71,64.9 0 bottom
LOGO87  SFE_LOGO_NAME.1_INCH  [SFE_LOGO_NAME_.1]  83.44,60.45 0 bottom
LOGO88  OSHW-LOGOS  [OSHW-LOGO-S]  94.23,66.42 0 bottom
LOGO89  SFE_LOGO_FLAME.1_INCH  [SFE_LOGO_FLAME_.1]  92.46,64.9 0 bottom
LOGO90  SFE_LOGO_NAME.1_INCH  [SFE_LOGO_NAME_.1]  99.19,60.45 0 bottom
LOGO91  OSHW-LOGOS  [OSHW-LOGO-S]  109.98,66.42 0 bottom
LOGO92  SFE_LOGO_FLAME.1_INCH  [SFE_LOGO_FLAME_.1]  108.2,64.9 0 bottom
LOGO93  SFE_LOGO_NAME.1_INCH  [SFE_LOGO_NAME_.1]  114.94,60.45 0 bottom
LOGO94  OSHW-LOGOS  [OSHW-LOGO-S]  125.73,66.42 0 bottom
LOGO95  SFE_LOGO_FLAME.1_INCH  [SFE_LOGO_FLAME_.1]  123.95,64.9 0 bottom
LOGO96  SFE_LOGO_NAME.1_INCH  [SFE_LOGO_NAME_.1]  130.68,60.45 0 bottom
LOGO97  OSHW-LOGOS  [OSHW-LOGO-S]  15.49,82.17 0 bottom
LOGO98  SFE_LOGO_FLAME.1_INCH  [SFE_LOGO_FLAME_.1]  13.72,80.64 0 bottom
LOGO99  SFE_LOGO_NAME.1_INCH  [SFE_LOGO_NAME_.1]  20.45,76.2 0 bottom
LOGO100  OSHW-LOGOS  [OSHW-LOGO-S]  31.24,82.17 0 bottom
LOGO101  SFE_LOGO_FLAME.1_INCH  [SFE_LOGO_FLAME_.1]  29.46,80.64 0 bottom
LOGO102  SFE_LOGO_NAME.1_INCH  [SFE_LOGO_NAME_.1]  36.2,76.2 0 bottom
LOGO103  OSHW-LOGOS  [OSHW-LOGO-S]  46.99,82.17 0 bottom
LOGO104  SFE_LOGO_FLAME.1_INCH  [SFE_LOGO_FLAME_.1]  45.21,80.64 0 bottom
LOGO105  SFE_LOGO_NAME.1_INCH  [SFE_LOGO_NAME_.1]  51.94,76.2 0 bottom
LOGO106  OSHW-LOGOS  [OSHW-LOGO-S]  62.74,82.17 0 bottom
LOGO107  SFE_LOGO_FLAME.1_INCH  [SFE_LOGO_FLAME_.1]  60.96,80.64 0 bottom
LOGO108  SFE_LOGO_NAME.1_INCH  [SFE_LOGO_NAME_.1]  67.69,76.2 0 bottom
LOGO109  OSHW-LOGOS  [OSHW-LOGO-S]  78.49,82.17 0 bottom
LOGO110  SFE_LOGO_FLAME.1_INCH  [SFE_LOGO_FLAME_.1]  76.71,80.64 0 bottom
LOGO111  SFE_LOGO_NAME.1_INCH  [SFE_LOGO_NAME_.1]  83.44,76.2 0 bottom
LOGO112  OSHW-LOGOS  [OSHW-LOGO-S]  94.23,82.17 0 bottom
LOGO113  SFE_LOGO_FLAME.1_INCH  [SFE_LOGO_FLAME_.1]  92.46,80.64 0 bottom
LOGO114  SFE_LOGO_NAME.1_INCH  [SFE_LOGO_NAME_.1]  99.19,76.2 0 bottom
LOGO115  OSHW-LOGOS  [OSHW-LOGO-S]  109.98,82.17 0 bottom
LOGO116  SFE_LOGO_FLAME.1_INCH  [SFE_LOGO_FLAME_.1]  108.2,80.64 0 bottom
LOGO117  SFE_LOGO_NAME.1_INCH  [SFE_LOGO_NAME_.1]  114.94,76.2 0 bottom
LOGO118  OSHW-LOGOS  [OSHW-LOGO-S]  125.73,82.17 0 bottom
LOGO119  SFE_LOGO_FLAME.1_INCH  [SFE_LOGO_FLAME_.1]  123.95,80.64 0 bottom
LOGO120  SFE_LOGO_NAME.1_INCH  [SFE_LOGO_NAME_.1]  130.68,76.2 0 bottom
LOGO121  OSHW-LOGOS  [OSHW-LOGO-S]  15.49,97.92 0 bottom
LOGO122  SFE_LOGO_FLAME.1_INCH  [SFE_LOGO_FLAME_.1]  13.72,96.39 0 bottom
LOGO123  SFE_LOGO_NAME.1_INCH  [SFE_LOGO_NAME_.1]  20.45,91.95 0 bottom
LOGO124  OSHW-LOGOS  [OSHW-LOGO-S]  31.24,97.92 0 bottom
LOGO125  SFE_LOGO_FLAME.1_INCH  [SFE_LOGO_FLAME_.1]  29.46,96.39 0 bottom
LOGO126  SFE_LOGO_NAME.1_INCH  [SFE_LOGO_NAME_.1]  36.2,91.95 0 bottom
LOGO127  OSHW-LOGOS  [OSHW-LOGO-S]  46.99,97.92 0 bottom
LOGO128  SFE_LOGO_FLAME.1_INCH  [SFE_LOGO_FLAME_.1]  45.21,96.39 0 bottom
LOGO129  SFE_LOGO_NAME.1_INCH  [SFE_LOGO_NAME_.1]  51.94,91.95 0 bottom
LOGO130  OSHW-LOGOS  [OSHW-LOGO-S]  62.74,97.92 0 bottom
LOGO131  SFE_LOGO_FLAME.1_INCH  [SFE_LOGO_FLAME_.1]  60.96,96.39 0 bottom
LOGO132  SFE_LOGO_NAME.1_INCH  [SFE_LOGO_NAME_.1]  67.69,91.95 0 bottom
LOGO133  OSHW-LOGOS  [OSHW-LOGO-S]  78.49,97.92 0 bottom
LOGO134  SFE_LOGO_FLAME.1_INCH  [SFE_LOGO_FLAME_.1]  76.71,96.39 0 bottom
LOGO135  SFE_LOGO_NAME.1_INCH  [SFE_LOGO_NAME_.1]  83.44,91.95 0 bottom
LOGO136  OSHW-LOGOS  [OSHW-LOGO-S]  94.23,97.92 0 bottom
LOGO137  SFE_LOGO_FLAME.1_INCH  [SFE_LOGO_FLAME_.1]  92.46,96.39 0 bottom
LOGO138  SFE_LOGO_NAME.1_INCH  [SFE_LOGO_NAME_.1]  99.19,91.95 0 bottom
LOGO139  OSHW-LOGOS  [OSHW-LOGO-S]  109.98,97.92 0 bottom
LOGO140  SFE_LOGO_FLAME.1_INCH  [SFE_LOGO_FLAME_.1]  108.2,96.39 0 bottom
LOGO141  SFE_LOGO_NAME.1_INCH  [SFE_LOGO_NAME_.1]  114.94,91.95 0 bottom
LOGO142  OSHW-LOGOS  [OSHW-LOGO-S]  125.73,97.92 0 bottom
LOGO143  SFE_LOGO_FLAME.1_INCH  [SFE_LOGO_FLAME_.1]  123.95,96.39 0 bottom
LOGO144  SFE_LOGO_NAME.1_INCH  [SFE_LOGO_NAME_.1]  130.68,91.95 0 bottom
LOGO145  OSHW-LOGOS  [OSHW-LOGO-S]  15.49,113.67 0 bottom
LOGO146  SFE_LOGO_FLAME.1_INCH  [SFE_LOGO_FLAME_.1]  13.72,112.14 0 bottom
LOGO147  SFE_LOGO_NAME.1_INCH  [SFE_LOGO_NAME_.1]  20.45,107.7 0 bottom
LOGO148  OSHW-LOGOS  [OSHW-LOGO-S]  31.24,113.67 0 bottom
LOGO149  SFE_LOGO_FLAME.1_INCH  [SFE_LOGO_FLAME_.1]  29.46,112.14 0 bottom
LOGO150  SFE_LOGO_NAME.1_INCH  [SFE_LOGO_NAME_.1]  36.2,107.7 0 bottom
LOGO151  OSHW-LOGOS  [OSHW-LOGO-S]  46.99,113.67 0 bottom
LOGO152  SFE_LOGO_FLAME.1_INCH  [SFE_LOGO_FLAME_.1]  45.21,112.14 0 bottom
LOGO153  SFE_LOGO_NAME.1_INCH  [SFE_LOGO_NAME_.1]  51.94,107.7 0 bottom
LOGO154  OSHW-LOGOS  [OSHW-LOGO-S]  62.74,113.67 0 bottom
LOGO155  SFE_LOGO_FLAME.1_INCH  [SFE_LOGO_FLAME_.1]  60.96,112.14 0 bottom
LOGO156  SFE_LOGO_NAME.1_INCH  [SFE_LOGO_NAME_.1]  67.69,107.7 0 bottom
LOGO157  OSHW-LOGOS  [OSHW-LOGO-S]  78.49,113.67 0 bottom
LOGO158  SFE_LOGO_FLAME.1_INCH  [SFE_LOGO_FLAME_.1]  76.71,112.14 0 bottom
LOGO159  SFE_LOGO_NAME.1_INCH  [SFE_LOGO_NAME_.1]  83.44,107.7 0 bottom
LOGO160  OSHW-LOGOS  [OSHW-LOGO-S]  94.23,113.67 0 bottom
LOGO161  SFE_LOGO_FLAME.1_INCH  [SFE_LOGO_FLAME_.1]  92.46,112.14 0 bottom
LOGO162  SFE_LOGO_NAME.1_INCH  [SFE_LOGO_NAME_.1]  99.19,107.7 0 bottom
LOGO163  OSHW-LOGOS  [OSHW-LOGO-S]  109.98,113.67 0 bottom
LOGO164  SFE_LOGO_FLAME.1_INCH  [SFE_LOGO_FLAME_.1]  108.2,112.14 0 bottom
LOGO165  SFE_LOGO_NAME.1_INCH  [SFE_LOGO_NAME_.1]  114.94,107.7 0 bottom
LOGO166  OSHW-LOGOS  [OSHW-LOGO-S]  125.73,113.67 0 bottom
LOGO167  SFE_LOGO_FLAME.1_INCH  [SFE_LOGO_FLAME_.1]  123.95,112.14 0 bottom
LOGO168  SFE_LOGO_NAME.1_INCH  [SFE_LOGO_NAME_.1]  130.68,107.7 0 bottom
LOGO169  OSHW-LOGOS  [OSHW-LOGO-S]  15.49,129.41 0 bottom
LOGO170  SFE_LOGO_FLAME.1_INCH  [SFE_LOGO_FLAME_.1]  13.72,127.89 0 bottom
LOGO171  SFE_LOGO_NAME.1_INCH  [SFE_LOGO_NAME_.1]  20.45,123.44 0 bottom
LOGO172  OSHW-LOGOS  [OSHW-LOGO-S]  31.24,129.41 0 bottom
LOGO173  SFE_LOGO_FLAME.1_INCH  [SFE_LOGO_FLAME_.1]  29.46,127.89 0 bottom
LOGO174  SFE_LOGO_NAME.1_INCH  [SFE_LOGO_NAME_.1]  36.2,123.44 0 bottom
LOGO175  OSHW-LOGOS  [OSHW-LOGO-S]  46.99,129.41 0 bottom
LOGO176  SFE_LOGO_FLAME.1_INCH  [SFE_LOGO_FLAME_.1]  45.21,127.89 0 bottom
LOGO177  SFE_LOGO_NAME.1_INCH  [SFE_LOGO_NAME_.1]  51.94,123.44 0 bottom
LOGO178  OSHW-LOGOS  [OSHW-LOGO-S]  62.74,129.41 0 bottom
LOGO179  SFE_LOGO_FLAME.1_INCH  [SFE_LOGO_FLAME_.1]  60.96,127.89 0 bottom
LOGO180  SFE_LOGO_NAME.1_INCH  [SFE_LOGO_NAME_.1]  67.69,123.44 0 bottom
LOGO181  OSHW-LOGOS  [OSHW-LOGO-S]  78.49,129.41 0 bottom
LOGO182  SFE_LOGO_FLAME.1_INCH  [SFE_LOGO_FLAME_.1]  76.71,127.89 0 bottom
LOGO183  SFE_LOGO_NAME.1_INCH  [SFE_LOGO_NAME_.1]  83.44,123.44 0 bottom
LOGO184  OSHW-LOGOS  [OSHW-LOGO-S]  94.23,129.41 0 bottom
LOGO185  SFE_LOGO_FLAME.1_INCH  [SFE_LOGO_FLAME_.1]  92.46,127.89 0 bottom
LOGO186  SFE_LOGO_NAME.1_INCH  [SFE_LOGO_NAME_.1]  99.19,123.44 0 bottom
LOGO187  OSHW-LOGOS  [OSHW-LOGO-S]  109.98,129.41 0 bottom
LOGO188  SFE_LOGO_FLAME.1_INCH  [SFE_LOGO_FLAME_.1]  108.2,127.89 0 bottom
LOGO189  SFE_LOGO_NAME.1_INCH  [SFE_LOGO_NAME_.1]  114.94,123.44 0 bottom
LOGO190  OSHW-LOGOS  [OSHW-LOGO-S]  125.73,129.41 0 bottom
LOGO191  SFE_LOGO_FLAME.1_INCH  [SFE_LOGO_FLAME_.1]  123.95,127.89 0 bottom
LOGO192  SFE_LOGO_NAME.1_INCH  [SFE_LOGO_NAME_.1]  130.68,123.44 0 bottom
R1  10K  [0603-RES]  14.48,20.83 0 top
R2  10K  [0603-RES]  30.23,20.83 0 top
R3  10K  [0603-RES]  45.97,20.83 0 top
R4  10K  [0603-RES]  61.72,20.83 0 top
R5  10K  [0603-RES]  77.47,20.83 0 top
R6  10K  [0603-RES]  93.22,20.83 0 top
R7  10K  [0603-RES]  108.97,20.83 0 top
R8  10K  [0603-RES]  124.71,20.83 0 top
R9  10K  [0603-RES]  14.48,36.58 0 top
R10  10K  [0603-RES]  30.23,36.58 0 top
R11  10K  [0603-RES]  45.97,36.58 0 top
R12  10K  [0603-RES]  61.72,36.58 0 top
R13  10K  [0603-RES]  77.47,36.58 0 top
R14  10K  [0603-RES]  93.22,36.58 0 top
R15  10K  [0603-RES]  108.97,36.58 0 top
R16  10K  [0603-RES]  124.71,36.58 0 top
R17  10K  [0603-RES]  14.48,52.32 0 top
R18  10K  [0603-RES]  30.23,52.32 0 top
R19  10K  [0603-RES]  45.97,52.32 0 top
R20  10K  [0603-RES]  61.72,52.32 0 top
R21  10K  [0603-RES]  77.47,52.32 0 top
R22  10K  [0603-RES]  93.22,52.32 0 top
R23  10K  [0603-RES]  108.97,52.32 0 top
R24  10K  [0603-RES]  124.71,52.32 0 top
R25  10K  [0603-RES]  14.48,68.07 0 top
R26  10K  [0603-RES]  30.23,68.07 0 top
R27  10K  [0603-RES]  45.97,68.07 0 top
R28  10K  [0603-RES]  61.72,68.07 0 top
R29  10K  [0603-RES]  77.47,68.07 0 top
R30  10K  [0603-RES]  93.22,68.07 0 top
R31  10K  [0603-RES]  108.97,68.07 0 top
R32  10K  [0603-RES]  124.71,68.07 0 top
R33  10K  [0603-RES]  14.48,83.82 0 top
R34  10K  [0603-RES]  30.23,83.82 0 top
R35  10K  [0603-RES]  45.97,83.82 0 top
R36  10K  [0603-RES]  61.72,83.82 0 top
R37  10K  [0603-RES]  77.47,83.82 0 top
R38  10K  [0603-RES]  93.22,83.82 0 top
R39  10K  [0603-RES]  108.97,83.82 0 top
R40  10K  [0603-RES]  124.71,83.82 0 top
R41  10K  [0603-RES]  14.48,99.57 0 top
R42  10K  [0603-RES]  30.23,99.57 0 top
R43  10K  [0603-RES]  45.97,99.57 0 top
R44  10K  [0603-RES]  61.72,99.57 0 top
R45  10K  [0603-RES]  77.47,99.57 0 top
R46  10K  [0603-RES]  93.22,99.57 0 top
R47  10K  [0603-RES]  108.97,99.57 0 top
R48  10K  [0603-RES]  124.71,99.57 0 top
R49  10K  [0603-RES]  14.48,115.32 0 top
R50  10K  [0603-RES]  30.23,115.32 0 top
R51  10K  [0603-RES]  45.97,115.32 0 top
R52  10K  [0603-RES]  61.72,115.32 0 top
R53  10K  [0603-RES]  77.47,115.32 0 top
R54  10K  [0603-RES]  93.22,115.32 0 top
R55  10K  [0603-RES]  108.97,115.32 0 top
R56  10K  [0603-RES]  124.71,115.32 0 top
R57  10K  [0603-RES]  14.48,131.06 0 top
R58  10K  [0603-RES]  30.23,131.06 0 top
R59  10K  [0603-RES]  45.97,131.06 0 top
R60  10K  [0603-RES]  61.72,131.06 0 top
R61  10K  [0603-RES]  77.47,131.06 0 top
R62  10K  [0603-RES]  93.22,131.06 0 top
R63  10K  [0603-RES]  108.97,131.06 0 top
R64  10K  [0603-RES]  124.71,131.06 0 top
STANDOFF1  STAND-OFF  [STAND-OFF]  19.56,19.56 0 top
STANDOFF2  STAND-OFF  [STAND-OFF]  9.4,19.56 0 top
STANDOFF3  STAND-OFF  [STAND-OFF]  35.31,19.56 0 top
STANDOFF4  STAND-OFF  [STAND-OFF]  25.15,19.56 0 top
STANDOFF5  STAND-OFF  [STAND-OFF]  51.05,19.56 0 top
STANDOFF6  STAND-OFF  [STAND-OFF]  40.89,19.56 0 top
STANDOFF7  STAND-OFF  [STAND-OFF]  66.8,19.56 0 top
STANDOFF8  STAND-OFF  [STAND-OFF]  56.64,19.56 0 top
STANDOFF9  STAND-OFF  [STAND-OFF]  82.55,19.56 0 top
STANDOFF10  STAND-OFF  [STAND-OFF]  72.39,19.56 0 top
STANDOFF11  STAND-OFF  [STAND-OFF]  98.3,19.56 0 top
STANDOFF12  STAND-OFF  [STAND-OFF]  88.14,19.56 0 top
STANDOFF13  STAND-OFF  [STAND-OFF]  114.05,19.56 0 top
STANDOFF14  STAND-OFF  [STAND-OFF]  103.89,19.56 0 top
STANDOFF15  STAND-OFF  [STAND-OFF]  129.79,19.56 0 top
STANDOFF16  STAND-OFF  [STAND-OFF]  119.63,19.56 0 top
STANDOFF17  STAND-OFF  [STAND-OFF]  19.56,35.31 0 top
STANDOFF18  STAND-OFF  [STAND-OFF]  9.4,35.31 0 top
STANDOFF19  STAND-OFF  [STAND-OFF]  35.31,35.31 0 top
STANDOFF20  STAND-OFF  [STAND-OFF]  25.15,35.31 0 top
STANDOFF21  STAND-OFF  [STAND-OFF]  51.05,35.31 0 top
STANDOFF22  STAND-OFF  [STAND-OFF]  40.89,35.31 0 top
STANDOFF23  STAND-OFF  [STAND-OFF]  66.8,35.31 0 top
STANDOFF24  STAND-OFF  [STAND-OFF]  56.64,35.31 0 top
STANDOFF25  STAND-OFF  [STAND-OFF]  82.55,35.31 0 top
STANDOFF26  STAND-OFF  [STAND-OFF]  72.39,35.31 0 top
STANDOFF27  STAND-OFF  [STAND-OFF]  98.3,35.31 0 top
STANDOFF28  STAND-OFF  [STAND-OFF]  88.14,35.31 0 top
STANDOFF29  STAND-OFF  [STAND-OFF]  114.05,35.31 0 top
STANDOFF30  STAND-OFF  [STAND-OFF]  103.89,35.31 0 top
STANDOFF31  STAND-OFF  [STAND-OFF]  129.79,35.31 0 top
STANDOFF32  STAND-OFF  [STAND-OFF]  119.63,35.31 0 top
STANDOFF33  STAND-OFF  [STAND-OFF]  19.56,51.05 0 top
STANDOFF34  STAND-OFF  [STAND-OFF]  9.4,51.05 0 top
STANDOFF35  STAND-OFF  [STAND-OFF]  35.31,51.05 0 top
STANDOFF36  STAND-OFF  [STAND-OFF]  25.15,51.05 0 top
STANDOFF37  STAND-OFF  [STAND-OFF]  51.05,51.05 0 top
STANDOFF38  STAND-OFF  [STAND-OFF]  40.89,51.05 0 top
STANDOFF39  STAND-OFF  [STAND-OFF]  66.8,51.05 0 top
STANDOFF40  STAND-OFF  [STAND-OFF]  56.64,51.05 0 top
STANDOFF41  STAND-OFF  [STAND-OFF]  82.55,51.05 0 top
STANDOFF42  STAND-OFF  [STAND-OFF]  72.39,51.05 0 top
STANDOFF43  STAND-OFF  [STAND-OFF]  98.3,51.05 0 top
STANDOFF44  STAND-OFF  [STAND-OFF]  88.14,51.05 0 top
STANDOFF45  STAND-OFF  [STAND-OFF]  114.05,51.05 0 top
STANDOFF46  STAND-OFF  [STAND-OFF]  103.89,51.05 0 top
STANDOFF47  STAND-OFF  [STAND-OFF]  129.79,51.05 0 top
STANDOFF48  STAND-OFF  [STAND-OFF]  119.63,51.05 0 top
STANDOFF49  STAND-OFF  [STAND-OFF]  19.56,66.8 0 top
STANDOFF50  STAND-OFF  [STAND-OFF]  9.4,66.8 0 top
STANDOFF51  STAND-OFF  [STAND-OFF]  35.31,66.8 0 top
STANDOFF52  STAND-OFF  [STAND-OFF]  25.15,66.8 0 top
STANDOFF53  STAND-OFF  [STAND-OFF]  51.05,66.8 0 top
STANDOFF54  STAND-OFF  [STAND-OFF]  40.89,66.8 0 top
STANDOFF55  STAND-OFF  [STAND-OFF]  66.8,66.8 0 top
STANDOFF56  STAND-OFF  [STAND-OFF]  56.64,66.8 0 top
STANDOFF57  STAND-OFF  [STAND-OFF]  82.55,66.8 0 top
STANDOFF58  STAND-OFF  [STAND-OFF]  72.39,66.8 0 top
STANDOFF59  STAND-OFF  [STAND-OFF]  98.3,66.8 0 top
STANDOFF60  STAND-OFF  [STAND-OFF]  88.14,66.8 0 top
STANDOFF61  STAND-OFF  [STAND-OFF]  114.05,66.8 0 top
STANDOFF62  STAND-OFF  [STAND-OFF]  103.89,66.8 0 top
STANDOFF63  STAND-OFF  [STAND-OFF]  129.79,66.8 0 top
STANDOFF64  STAND-OFF  [STAND-OFF]  119.63,66.8 0 top
STANDOFF65  STAND-OFF  [STAND-OFF]  19.56,82.55 0 top
STANDOFF66  STAND-OFF  [STAND-OFF]  9.4,82.55 0 top
STANDOFF67  STAND-OFF  [STAND-OFF]  35.31,82.55 0 top
STANDOFF68  STAND-OFF  [STAND-OFF]  25.15,82.55 0 top
STANDOFF69  STAND-OFF  [STAND-OFF]  51.05,82.55 0 top
STANDOFF70  STAND-OFF  [STAND-OFF]  40.89,82.55 0 top
STANDOFF71  STAND-OFF  [STAND-OFF]  66.8,82.55 0 top
STANDOFF72  STAND-OFF  [STAND-OFF]  56.64,82.55 0 top
STANDOFF73  STAND-OFF  [STAND-OFF]  82.55,82.55 0 top
STANDOFF74  STAND-OFF  [STAND-OFF]  72.39,82.55 0 top
STANDOFF75  STAND-OFF  [STAND-OFF]  98.3,82.55 0 top
STANDOFF76  STAND-OFF  [STAND-OFF]  88.14,82.55 0 top
STANDOFF77  STAND-OFF  [STAND-OFF]  114.05,82.55 0 top
STANDOFF78  STAND-OFF  [STAND-OFF]  103.89,82.55 0 top
STANDOFF79  STAND-OFF  [STAND-OFF]  129.79,82.55 0 top
STANDOFF80  STAND-OFF  [STAND-OFF]  119.63,82.55 0 top
STANDOFF81  STAND-OFF  [STAND-OFF]  19.56,98.3 0 top
STANDOFF82  STAND-OFF  [STAND-OFF]  9.4,98.3 0 top
STANDOFF83  STAND-OFF  [STAND-OFF]  35.31,98.3 0 top
STANDOFF84  STAND-OFF  [STAND-OFF]  25.15,98.3 0 top
STANDOFF85  STAND-OFF  [STAND-OFF]  51.05,98.3 0 top
STANDOFF86  STAND-OFF  [STAND-OFF]  40.89,98.3 0 top
STANDOFF87  STAND-OFF  [STAND-OFF]  66.8,98.3 0 top
STANDOFF88  STAND-OFF  [STAND-OFF]  56.64,98.3 0 top
STANDOFF89  STAND-OFF  [STAND-OFF]  82.55,98.3 0 top
STANDOFF90  STAND-OFF  [STAND-OFF]  72.39,98.3 0 top
STANDOFF91  STAND-OFF  [STAND-OFF]  98.3,98.3 0 top
STANDOFF92  STAND-OFF  [STAND-OFF]  88.14,98.3 0 top
STANDOFF93  STAND-OFF  [STAND-OFF]  114.05,98.3 0 top
STANDOFF94  STAND-OFF  [STAND-OFF]  103.89,98.3 0 top
STANDOFF95  STAND-OFF  [STAND-OFF]  129.79,98.3 0 top
STANDOFF96  STAND-OFF  [STAND-OFF]  119.63,98.3 0 top
STANDOFF97  STAND-OFF  [STAND-OFF]  19.56,114.05 0 top
STANDOFF98  STAND-OFF  [STAND-OFF]  9.4,114.05 0 top
STANDOFF99  STAND-OFF  [STAND-OFF]  35.31,114.05 0 top
STANDOFF100  STAND-OFF  [STAND-OFF]  25.15,114.05 0 top
STANDOFF101  STAND-OFF  [STAND-OFF]  51.05,114.05 0 top
STANDOFF102  STAND-OFF  [STAND-OFF]  40.89,114.05 0 top
STANDOFF103  STAND-OFF  [STAND-OFF]  66.8,114.05 0 top
STANDOFF104  STAND-OFF  [STAND-OFF]  56.64,114.05 0 top
STANDOFF105  STAND-OFF  [STAND-OFF]  82.55,114.05 0 top
STANDOFF106  STAND-OFF  [STAND-OFF]  72.39,114.05 0 top
STANDOFF107  STAND-OFF  [STAND-OFF]  98.3,114.05 0 top
STANDOFF108  STAND-OFF  [STAND-OFF]  88.14,114.05 0 top
STANDOFF109  STAND-OFF  [STAND-OFF]  114.05,114.05 0 top
STANDOFF110  STAND-OFF  [STAND-OFF]  103.89,114.05 0 top
STANDOFF111  STAND-OFF  [STAND-OFF]  129.79,114.05 0 top
STANDOFF112  STAND-OFF  [STAND-OFF]  119.63,114.05 0 top
STANDOFF113  STAND-OFF  [STAND-OFF]  19.56,129.79 0 top
STANDOFF114  STAND-OFF  [STAND-OFF]  9.4,129.79 0 top
STANDOFF115  STAND-OFF  [STAND-OFF]  35.31,129.79 0 top
STANDOFF116  STAND-OFF  [STAND-OFF]  25.15,129.79 0 top
STANDOFF117  STAND-OFF  [STAND-OFF]  51.05,129.79 0 top
STANDOFF118  STAND-OFF  [STAND-OFF]  40.89,129.79 0 top
STANDOFF119  STAND-OFF  [STAND-OFF]  66.8,129.79 0 top
STANDOFF120  STAND-OFF  [STAND-OFF]  56.64,129.79 0 top
STANDOFF121  STAND-OFF  [STAND-OFF]  82.55,129.79 0 top
STANDOFF122  STAND-OFF  [STAND-OFF]  72.39,129.79 0 top
STANDOFF123  STAND-OFF  [STAND-OFF]  98.3,129.79 0 top
STANDOFF124  STAND-OFF  [STAND-OFF]  88.14,129.79 0 top
STANDOFF125  STAND-OFF  [STAND-OFF]  114.05,129.79 0 top
STANDOFF126  STAND-OFF  [STAND-OFF]  103.89,129.79 0 top
STANDOFF127  STAND-OFF  [STAND-OFF]  129.79,129.79 0 top
STANDOFF128  STAND-OFF  [STAND-OFF]  119.63,129.79 0 top
U1  ML8511-UV-SENSOR  [ML8511]  14.48,17.02 270 top
U2  ML8511-UV-SENSOR  [ML8511]  30.23,17.02 270 top
U3  ML8511-UV-SENSOR  [ML8511]  45.97,17.02 270 top
U4  ML8511-UV-SENSOR  [ML8511]  61.72,17.02 270 top
U5  ML8511-UV-SENSOR  [ML8511]  77.47,17.02 270 top
U6  ML8511-UV-SENSOR  [ML8511]  93.22,17.02 270 top
U7  ML8511-UV-SENSOR  [ML8511]  108.97,17.02 270 top
U8  ML8511-UV-SENSOR  [ML8511]  124.71,17.02 270 top
U9  ML8511-UV-SENSOR  [ML8511]  14.48,32.77 270 top
U10  ML8511-UV-SENSOR  [ML8511]  30.23,32.77 270 top
U11  ML8511-UV-SENSOR  [ML8511]  45.97,32.77 270 top
U12  ML8511-UV-SENSOR  [ML8511]  61.72,32.77 270 top
U13  ML8511-UV-SENSOR  [ML8511]  77.47,32.77 270 top
U14  ML8511-UV-SENSOR  [ML8511]  93.22,32.77 270 top
U15  ML8511-UV-SENSOR  [ML8511]  108.97,32.77 270 top
U16  ML8511-UV-SENSOR  [ML8511]  124.71,32.77 270 top
U17  ML8511-UV-SENSOR  [ML8511]  14.48,48.51 270 top
U18  ML8511-UV-SENSOR  [ML8511]  30.23,48.51 270 top
U19  ML8511-UV-SENSOR  [ML8511]  45.97,48.51 270 top
U20  ML8511-UV-SENSOR  [ML8511]  61.72,48.51 270 top
U21  ML8511-UV-SENSOR  [ML8511]  77.47,48.51 270 top
U22  ML8511-UV-SENSOR  [ML8511]  93.22,48.51 270 top
U23  ML8511-UV-SENSOR  [ML8511]  108.97,48.51 270 top
U24  ML8511-UV-SENSOR  [ML8511]  124.71,48.51 270 top
U25  ML8511-UV-SENSOR  [ML8511]  14.48,64.26 270 top
U26  ML8511-UV-SENSOR  [ML8511]  30.23,64.26 270 top
U27  ML8511-UV-SENSOR  [ML8511]  45.97,64.26 270 top
U28  ML8511-UV-SENSOR  [ML8511]  61.72,64.26 270 top
U29  ML8511-UV-SENSOR  [ML8511]  77.47,64.26 270 top
U30  ML8511-UV-SENSOR  [ML8511]  93.22,64.26 270 top
U31  ML8511-UV-SENSOR  [ML8511]  108.97,64.26 270 top
U32  ML8511-UV-SENSOR  [ML8511]  124.71,64.26 270 top
U33  ML8511-UV-SENSOR  [ML8511]  14.48,80.01 270 top
U34  ML8511-UV-SENSOR  [ML8511]  30.23,80.01 270 top
U35  ML8511-UV-SENSOR  [ML8511]  45.97,80.01 270 top
U36  ML8511-UV-SENSOR  [ML8511]  61.72,80.01 270 top
U37  ML8511-UV-SENSOR  [ML8511]  77.47,80.01 270 top
U38  ML8511-UV-SENSOR  [ML8511]  93.22,80.01 270 top
U39  ML8511-UV-SENSOR  [ML8511]  108.97,80.01 270 top
U40  ML8511-UV-SENSOR  [ML8511]  124.71,80.01 270 top
U41  ML8511-UV-SENSOR  [ML8511]  14.48,95.76 270 top
U42  ML8511-UV-SENSOR  [ML8511]  30.23,95.76 270 top
U43  ML8511-UV-SENSOR  [ML8511]  45.97,95.76 270 top
U44  ML8511-UV-SENSOR  [ML8511]  61.72,95.76 270 top
U45  ML8511-UV-SENSOR  [ML8511]  77.47,95.76 270 top
U46  ML8511-UV-SENSOR  [ML8511]  93.22,95.76 270 top
U47  ML8511-UV-SENSOR  [ML8511]  108.97,95.76 270 top
U48  ML8511-UV-SENSOR  [ML8511]  124.71,95.76 270 top
U49  ML8511-UV-SENSOR  [ML8511]  14.48,111.51 270 top
U50  ML8511-UV-SENSOR  [ML8511]  30.23,111.51 270 top
U51  ML8511-UV-SENSOR  [ML8511]  45.97,111.51 270 top
U52  ML8511-UV-SENSOR  [ML8511]  61.72,111.51 270 top
U53  ML8511-UV-SENSOR  [ML8511]  77.47,111.51 270 top
U54  ML8511-UV-SENSOR  [ML8511]  93.22,111.51 270 top
U55  ML8511-UV-SENSOR  [ML8511]  108.97,111.51 270 top
U56  ML8511-UV-SENSOR  [ML8511]  124.71,111.51 270 top
U57  ML8511-UV-SENSOR  [ML8511]  14.48,127.25 270 top
U58  ML8511-UV-SENSOR  [ML8511]  30.23,127.25 270 top
U59  ML8511-UV-SENSOR  [ML8511]  45.97,127.25 270 top
U60  ML8511-UV-SENSOR  [ML8511]  61.72,127.25 270 top
U61  ML8511-UV-SENSOR  [ML8511]  77.47,127.25 270 top
U62  ML8511-UV-SENSOR  [ML8511]  93.22,127.25 270 top
U63  ML8511-UV-SENSOR  [ML8511]  108.97,127.25 270 top
U64  ML8511-UV-SENSOR  [ML8511]  124.71,127.25 270 top

## Library data of the parts
C1 C3 C5 C7 C9 C11 C13 C15 C17 C19 C21 C23 C25 C27 C29 C31 C33 C35 C37 C39 C41 C43 C45 C47 C49 C51 C53 C55 C57 C59 C61 C63 C65 C67 C69 C71 C73 C75 C77 C79 C81 C83 C85 C87 C89 C91 C93 C95 C97 C99 C101 C103 C105 C107 C109 C111 C113 C115 C117 C119 C121 C123 C125 C127 = SparkFun-Capacitors; PROD_ID: CAP-07886
C2 C4 C6 C8 C10 C12 C14 C16 C18 C20 C22 C24 C26 C28 C30 C32 C34 C36 C38 C40 C42 C44 C46 C48 C50 C52 C54 C56 C58 C60 C62 C64 C66 C68 C70 C72 C74 C76 C78 C80 C82 C84 C86 C88 C90 C92 C94 C96 C98 C100 C102 C104 C106 C108 C110 C112 C114 C116 C118 C120 C122 C124 C126 C128 = SparkFun-Capacitors; PROD_ID: CAP-00810
E$1 E$4 E$5 FID1-FID128 LOGO1-LOGO192 = SparkFun-Aesthetics
JP1-JP64 = SparkFun-Connectors
R1-R64 = SparkFun-Resistors; PROD_ID: RES-00824
STANDOFF1-STANDOFF128 = SparkFun-Electromechanical
U1-U64 = ML8511